# EAGLE board schema_v1_2 (EAGLE 6.2)
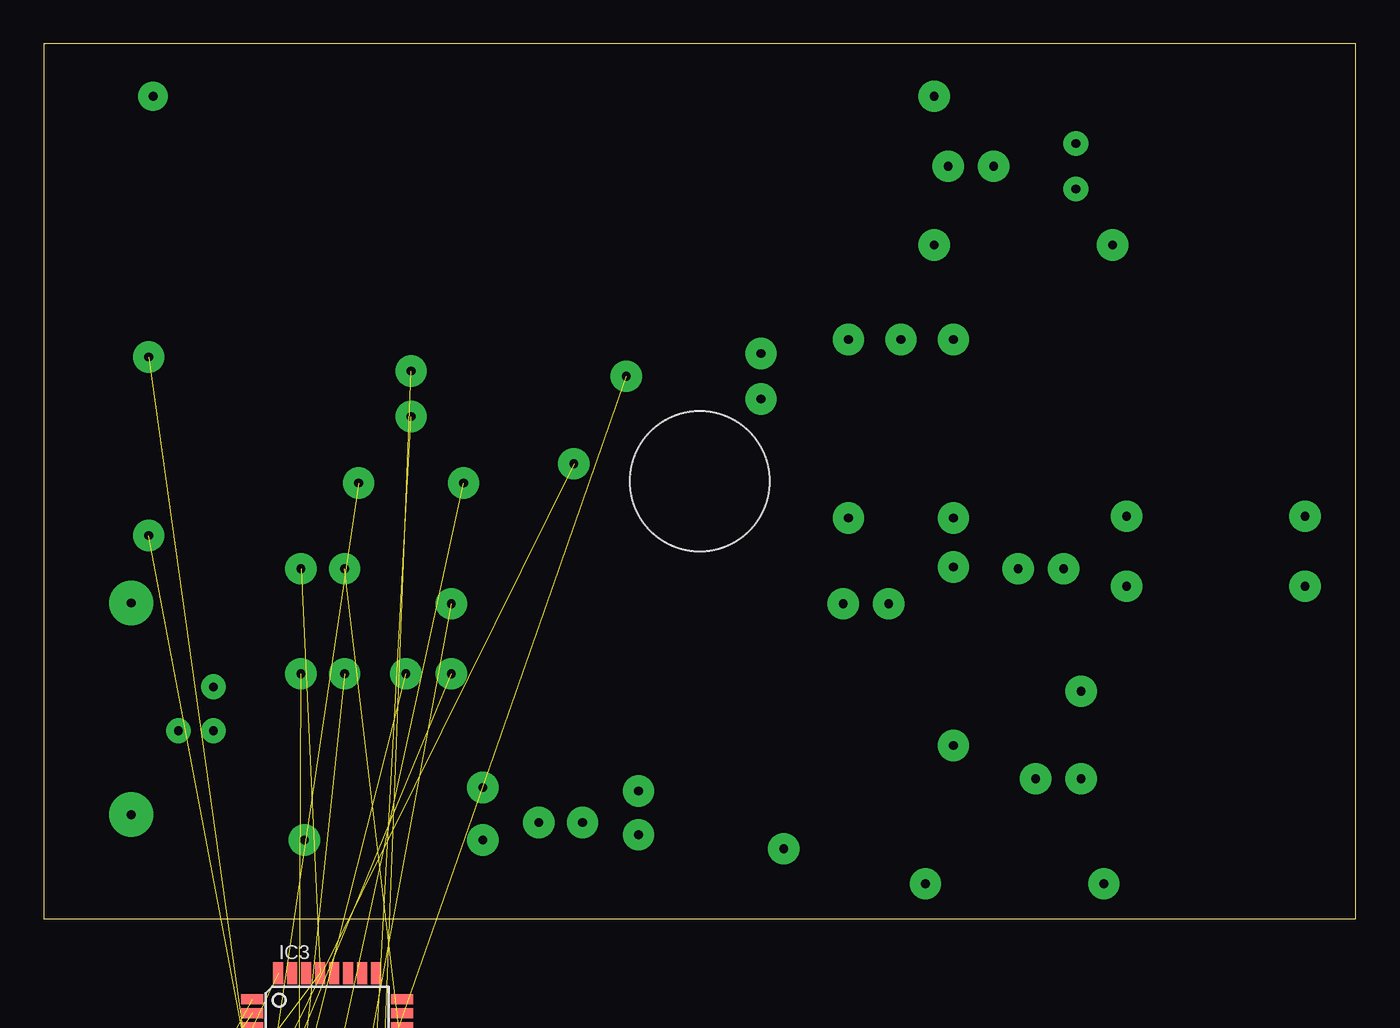
[diagram p0: board, top side]
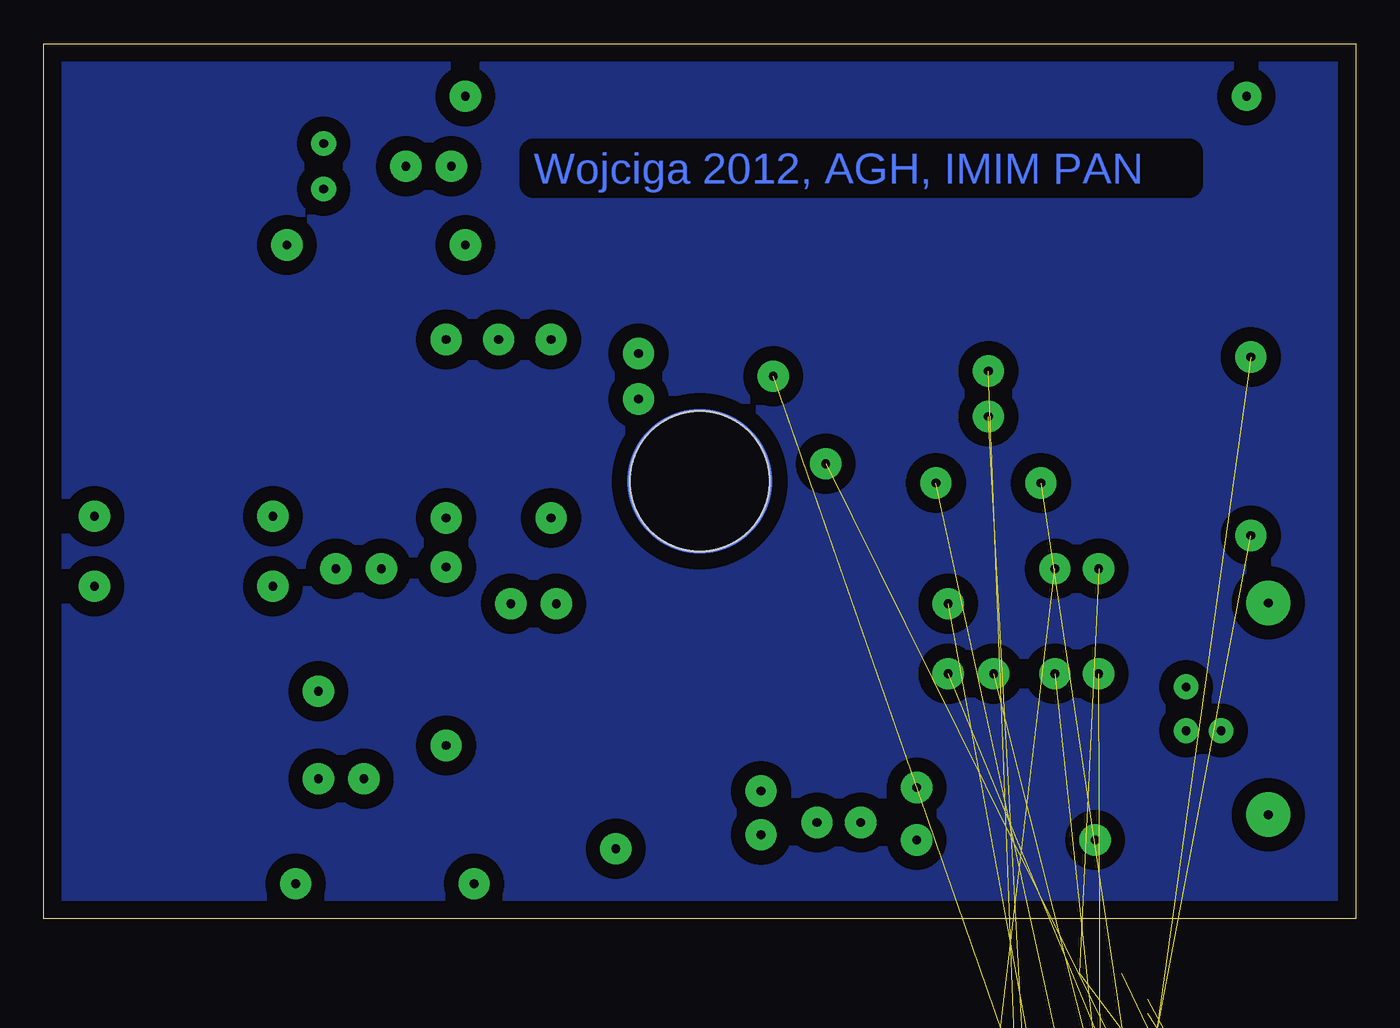
[diagram p1: board, bottom side, seen from below]

Size 75 x 50 mm. Coordinates in mm from the lower left corner, seen from the top.
Outline: 0,0 75,0 75,50 0,50 0,0
Copper layers (1*16): Top 0.035mm / dielectric 1.5mm / Bottom 0.035mm
Design rules: minimum track width 10mil, minimum drill 24mil, track to track 8mil, track to pad 8mil, pad to pad 8mil, via to via 8mil, smd to smd 8mil, copper to edge 40mil, drill to drill 8mil, minimum pad ring 10mil, minimum via ring 8mil, stop-mask expansion 4mil, vias tented up to drill 0mil, thermal gap 10mil
Net classes: 0 default: width 0.203 mm
Holes 8 mm at 37.5,25

## Footprints (pad centres in the part's own frame; a part is rotated, then mirrored left to right if it is on the bottom)
TACTILE_SWITCH_SMD = smd 1.524 x 0.762: 1 -2.54,1.905; 2 2.54,1.905; 3 -2.54,-1.905; 4 2.54,-1.905
C0805 = smd 1.3 x 1.5: 1 -0.95,0; 2 0.95,0
UD-6,3X5,8_NICHICON = smd 2.8 x 1: + 2.35,0; - -2.35,0
DO214AC = smd 1.8 x 1.7: A 2.05,0; C -2.05,0
TQFP32-08 = smd 1.27 x 0.559: 1 -4.293,2.8; 2 -4.293,2; 3 -4.293,1.2; 4 -4.293,0.4; 5 -4.293,-0.4; 6 -4.293,-1.2; 7 -4.293,-2; 8 -4.293,-2.8; 17 4.293,-2.8; 18 4.293,-2; 19 4.293,-1.2; 20 4.293,-0.4; 21 4.293,0.4; 22 4.293,1.2; 23 4.293,2; 24 4.293,2.8 | smd 0.559 x 1.27: 9 -2.8,-4.293; 10 -2,-4.293; 11 -1.2,-4.293; 12 -0.4,-4.293; 13 0.4,-4.293; 14 1.2,-4.293; 15 2,-4.293; 16 2.8,-4.293; 25 2.8,4.293; 26 2,4.293; 27 1.2,4.293; 28 0.4,4.293; 29 -0.4,4.293; 30 -1.2,4.293; 31 -2,4.293; 32 -2.8,4.293
1206 = smd 1.6 x 1.803: A -1.422,0; C 1.422,0
DIL4-SMD = smd 1.6 x 2: 1 -1.27,-4.77; 2 1.27,-4.77; 3 1.27,4.77; 4 -1.27,4.77
SOT23-BEC = smd 1 x 1.4: B -0.95,-1.1; C 0,1.1; E 0.95,-1.1
R0805 = smd 1.3 x 1.5: 1 -0.95,0; 2 0.95,0
TP13R = smd 1.3 x 1.3: TP 0,0
SSOP28DB = smd 0.348 x 1.397: 1 -4.225,-3.656; 2 -3.575,-3.656; 3 -2.925,-3.656; 4 -2.275,-3.656; 5 -1.625,-3.656; 6 -0.975,-3.656; 7 -0.325,-3.656; 8 0.325,-3.656; 9 0.975,-3.656; 10 1.625,-3.656; 11 2.275,-3.656; 12 2.925,-3.656; 13 3.575,-3.656; 14 4.225,-3.656; 15 4.225,3.656; 16 3.575,3.656; 17 2.925,3.656; 18 2.275,3.656; 19 1.625,3.656; 20 0.975,3.656; 21 0.325,3.656; 22 -0.325,3.656; 23 -0.975,3.656; 24 -1.625,3.656; 25 -2.275,3.656; 26 -2.925,3.656; 27 -3.575,3.656; 28 -4.225,3.656
PN61729-S = drill 0.95 octagon: 1 1.25,4.71; 2 -1.25,4.71; 3 -1.25,2.71; 4 1.25,2.71 | drill 2.3 pad 2.9: S1 -6.02,0; S2 6.02,0
W237-132 = drill 1.194 long: 1 -2.54,-0.635; 2 2.54,-0.635
CSM-7X-DU = smd 5.5 x 2: 1 -4.75,0; 2 4.75,0

## Placement (x,y rotation side)
BUTTON  [TACTILE_SWITCH_SMD]  -20.8,-70.1 0 top  (outside the outline)
C13  22pF  [C0805]  19.1,-28.3 0 top  (outside the outline)
C14  22pF  [C0805]  -6.3,-34.4 0 top  (outside the outline)
C15  100nF  [C0805]  -0.1,-28.3 0 top  (outside the outline)
C16  100nF  [C0805]  -22.2,-50.2 0 top  (outside the outline)
C17  [UD-6,3X5,8_NICHICON]  -57.5,-92.2 0 top  (outside the outline)
C19  100nF  [C0805]  6.3,-28.3 0 top  (outside the outline)
C23  100nF  [C0805]  12.7,-28.3 0 top  (outside the outline)
D4  GS1B  [DO214AC]  -5.2,-28.3 0 top  (outside the outline)
D5  GS1B  [DO214AC]  -50.4,-94.1 0 top  (outside the outline)
IC3  MEGA8-AI  [TQFP32-08]  16.2,-7.4 0 top  (outside the outline)
LED5  [1206]  6.1,-40.5 0 top  (outside the outline)
LED7  [1206]  12.2,-40.5 0 top  (outside the outline)
LED8  [1206]  18.3,-40.5 0 top  (outside the outline)
LED9  [1206]  -21.9,-66.4 0 top  (outside the outline)
LED10  [1206]  -21.9,-62.4 0 top  (outside the outline)
OK2  SFH6206  [DIL4-SMD]  -28.6,-72.9 0 top  (outside the outline)
POWER1  [TACTILE_SWITCH_SMD]  0.3,-40.1 0 top  (outside the outline)
Q2  BC817-16SMD  [SOT23-BEC]  -58.9,-100.8 0 top  (outside the outline)
R12  22k  [R0805]  -1,-34.4 0 top  (outside the outline)
R13  330  [R0805]  4.2,-34.4 0 top  (outside the outline)
R14  330  [R0805]  9.4,-34.4 0 top  (outside the outline)
R15  330  [R0805]  14.6,-34.4 0 top  (outside the outline)
R16  1k  [R0805]  19.8,-34.4 0 top  (outside the outline)
R17  1k  [R0805]  -6.3,-40.5 0 top  (outside the outline)
R18  330  [R0805]  -22.2,-56.3 0 top  (outside the outline)
R19  330  [R0805]  -17,-56.3 0 top  (outside the outline)
R20  330  [R0805]  -22.2,-75.8 0 top  (outside the outline)
R21  1k  [R0805]  -30.8,-81.9 0 top  (outside the outline)
R22  10k  [R0805]  -30.8,-88 0 top  (outside the outline)
TP1  TPTP13R  [TP13R]  23.2,-39.9 0 top  (outside the outline)
TP2  TPTP13R  [TP13R]  -7.2,-46 0 top  (outside the outline)
U2  [SSOP28DB]  14.9,-20.7 0 top  (outside the outline)
X4  PN61729-S  [PN61729-S]  -16.5,-36.8 0 top  (outside the outline)
X5  [W237-132]  -38,-83.5 0 top  (outside the outline)
X6  [W237-132]  -48.4,-83.5 0 top  (outside the outline)
XTAL  16MHZ  [CSM-7X-DU]  -0.2,-20.5 0 top  (outside the outline)

## Library data of the parts
BUTTON POWER1 = SparkFun
C13-C17 C19 C23 R12-R22 = rcl
D4 D5 = diode
IC3 = atmel; MPN: ATMEGA8-16AU; OC_FARNELL: 9171371; OC_NEWARK: 73M8863
LED5 LED7-LED10 = led
OK2 = optocoupler; MF: VISHAY/TELEFUNKEN; MPN: SFH6206-3; OC_FARNELL: 1469585; OC_NEWARK: 58K2214
Q2 = transistor-npn
TP1 TP2 = testpad
U2 = ftdichip-5
X4 = con-berg; OC_FARNELL: unknown; OC_NEWARK: unknown
X5 X6 = con-wago-508; OC_FARNELL: unknown; OC_NEWARK: unknown
XTAL = crystal; OC_FARNELL: unknown; OC_NEWARK: unknown

## Nets
+3V0: C15.1 D4.C IC3.4 IC3.6 IC3.18 R12.1
AGND: U2.25
GND: BUTTON.1 BUTTON.2 C13.1 C14.1 C15.2 C16.2 C19.2 C23.1 IC3.3 IC3.5 IC3.21 LED8.C LED9.C LED10.C OK2.2 POWER1.3 POWER1.4 U2.26 X4.4 X4.S1 X4.S2
GND1: U2.7
GND2: U2.18
GND3: U2.21
N$33: IC3.30
N$34: R16.1 TP2.TP
N$35: C14.2 IC3.8 XTAL.2
N$36: C13.2 IC3.7 XTAL.1
N$37: C19.1 IC3.20
N$38: D4.A IC3.29 POWER1.1 POWER1.2 R12.2
N$39: LED5.A R13.1
N$40: LED7.A R14.1
N$41: LED5.C U2.23
N$42: LED7.C U2.22
N$43: R16.2 U2.5
N$44: R17.2 U2.1
N$45: BUTTON.3 BUTTON.4 R20.1
N$46: IC3.2 R18.2
N$47: C23.2 R13.2 R14.2 R15.2 U2.4 U2.19 U2.20 X4.1
N$48: U2.16 X4.2
N$49: U2.15 X4.3
N$50: IC3.1 R19.2
N$51: LED8.A R15.1
N$52: IC3.32 R20.2
N$96: C16.1 U2.17
N$97: LED9.A R18.1
N$98: LED10.A R19.1
N$99: IC3.31
N$100: R17.1 TP1.TP
N$101: OK2.3 Q2.B
N$102: OK2.1 R21.1
N$103: IC3.9 R21.2
N$104: OK2.4 R22.2
N$105: C17.+ D5.C R22.1 X5.2 X6.2
N$106: C17.- D5.A Q2.C X6.1
N$107: Q2.E X5.1

## Tracks (layer width: path | path; a pad name or v marks a point on that pad's centre or on a via)
+3V0  (5 unrouted)
GND  (20 unrouted)
  pour Bottom (isolate 0.813): 0.5,49.5 74.5,49.5 74.5,0.5 0.5,0.5
N$34  (1 unrouted)
N$35  (via drill 0.5 pad 1.78)  (3 unrouted)
  other vias: 6,32.1
N$36  (via drill 0.5 pad 1.78)  (3 unrouted)
  other vias: 6,21.9
N$37  (via drill 0.5 pad 1.78)  (2 unrouted)
  other vias: 17.2,20
N$38  (via drill 0.5 pad 1.78)  (5 unrouted)
  other vias: 14.7,20
N$39  (via drill 0.5 pad 1.78)  (2 unrouted)
  other vias: 23.3,14
N$40  (via drill 0.5 pad 1.78)  (2 unrouted)
  other vias: 20.7,14
N$41  (via drill 0.5 pad 1.78)  (2 unrouted)
  other vias: 17.2,14
N$42  (via drill 0.5 pad 1.78)  (2 unrouted)
  other vias: 14.7,14
N$43  (via drill 0.5 pad 1.78)  (2 unrouted)
  other vias: 24,24.9
N$44  (via drill 0.5 pad 1.78)  (2 unrouted)
  other vias: 18,24.9
N$45  (via drill 0.5 pad 1.78)  (3 unrouted)
  other vias: 30.3,26
N$46  (1 unrouted)
N$47  (via drill 0.5 pad 1.78)  (8 unrouted)
  other vias: 33.3,31
N$48  (via drill 0.5 pad 1.78)  (2 unrouted)
  other vias: 21,28.7
N$49  (via drill 0.5 pad 1.78)  (2 unrouted)
  other vias: 21,31.3
N$50  (1 unrouted)
N$51  (via drill 0.5 pad 1.78)  (2 unrouted)
  other vias: 23.3,18
N$52  (1 unrouted)
N$53  (via drill 0.5 pad 1.78)
  other vias: 14.9,4.5
N$54  (via drill 0.5 pad 1.78)
  other vias: 25.1,4.5
N$55  (via drill 0.5 pad 1.78)
  other vias: 25.1,7.5
N$56  (via drill 0.5 pad 1.78)
  other vias: 28.3,5.5
N$57  (via drill 0.5 pad 1.78)
  other vias: 30.8,5.5
N$58  (via drill 0.5 pad 1.78)
  other vias: 34,4.8
N$59  (via drill 0.5 pad 1.78)
  other vias: 34,7.3
N$60  (via drill 0.5 pad 1.78)
  other vias: 42.3,4
N$61  (via drill 0.5 pad 1.78)
  other vias: 50.4,2
N$62  (via drill 0.5 pad 1.78)
  other vias: 60.6,2
N$63  (via drill 0.5 pad 1.78)
  other vias: 56.7,8
N$64  (via drill 0.5 pad 1.78)
  other vias: 59.3,8
N$65  (via drill 0.5 pad 1.78)
  other vias: 59.3,13
N$66  (via drill 0.5 pad 1.78)
  other vias: 45.7,18
N$67  (via drill 0.5 pad 1.78)
  other vias: 48.3,18
N$68  (via drill 0.5 pad 1.78)
  other vias: 52,9.9
N$69  (via drill 0.5 pad 1.78)
  other vias: 52,20.1
N$70  (via drill 0.5 pad 1.78)
  other vias: 52,22.9
N$71  (via drill 0.5 pad 1.78)
  other vias: 46,22.9
N$72  (via drill 0.5 pad 1.78)
  other vias: 55.7,20
N$73  (via drill 0.5 pad 1.78)
  other vias: 58.3,20
N$74  (via drill 0.5 pad 1.78)
  other vias: 61.9,19
N$75  (via drill 0.5 pad 1.78)
  other vias: 61.9,23
N$76  (via drill 0.5 pad 1.78)
  other vias: 72.1,23
N$77  (via drill 0.5 pad 1.78)
  other vias: 72.1,19
N$78  (via drill 0.5 pad 1.78)
  other vias: 41,29.7
N$79  (via drill 0.5 pad 1.78)
  other vias: 41,32.3
N$80  (via drill 0.5 pad 1.78)
  other vias: 46,33.1
N$81  (via drill 0.5 pad 1.78)
  other vias: 49,33.1
N$82  (via drill 0.5 pad 1.78)
  other vias: 52,33.1
N$83  (via drill 0.5 pad 1.78)
  other vias: 50.9,38.5
N$84  (via drill 0.5 pad 1.78)
  other vias: 61.1,38.5
N$85  (via drill 0.5 pad 1.78)
  other vias: 51.7,43
N$86  (via drill 0.5 pad 1.78)
  other vias: 54.3,43
N$87  (via drill 0.5 pad 1.78)
  other vias: 50.9,47
N$88  (via drill 0.5 pad 1.42)
  other vias: 9.7,13.25
N$89  (via drill 0.5 pad 1.42)
  other vias: 7.7,10.75
N$90  (via drill 0.5 pad 1.42)
  other vias: 9.7,10.75
N$91  (via drill 0.5 pad 1.68)
  other vias: 6.25,47
N$92  (via drill 0.5 pad 1.42)
  other vias: 59,41.7
N$93  (via drill 0.5 pad 1.42)
  other vias: 59,44.3
N$94  (via drill 0.5 pad 2.54)
  other vias: 5,18.05
N$95  (via drill 0.5 pad 2.54)
  other vias: 5,5.95
N$96  (1 unrouted)
N$97  (1 unrouted)
N$98  (1 unrouted)
N$100  (1 unrouted)
N$101  (1 unrouted)
N$102  (1 unrouted)
N$103  (1 unrouted)
N$104  (1 unrouted)
N$105  (4 unrouted)
N$106  (3 unrouted)
N$107  (1 unrouted)
(copper drawn outside any net)
  shapes: Bottom circle x2

## Text on the board
Bottom: Wojciga 2012, AGH, IMIM PAN